# Altium PCB PCB2A.PcbDoc
Units mm, origin at the board's own origin, x right, y up, seen from the top; angles counter-clockwise.
Board outline 36.75 x 32.02 mm, 2 copper layers (Top Layer, Bottom Layer); 36 components, 19 nets, 124 pads, 106 vias.
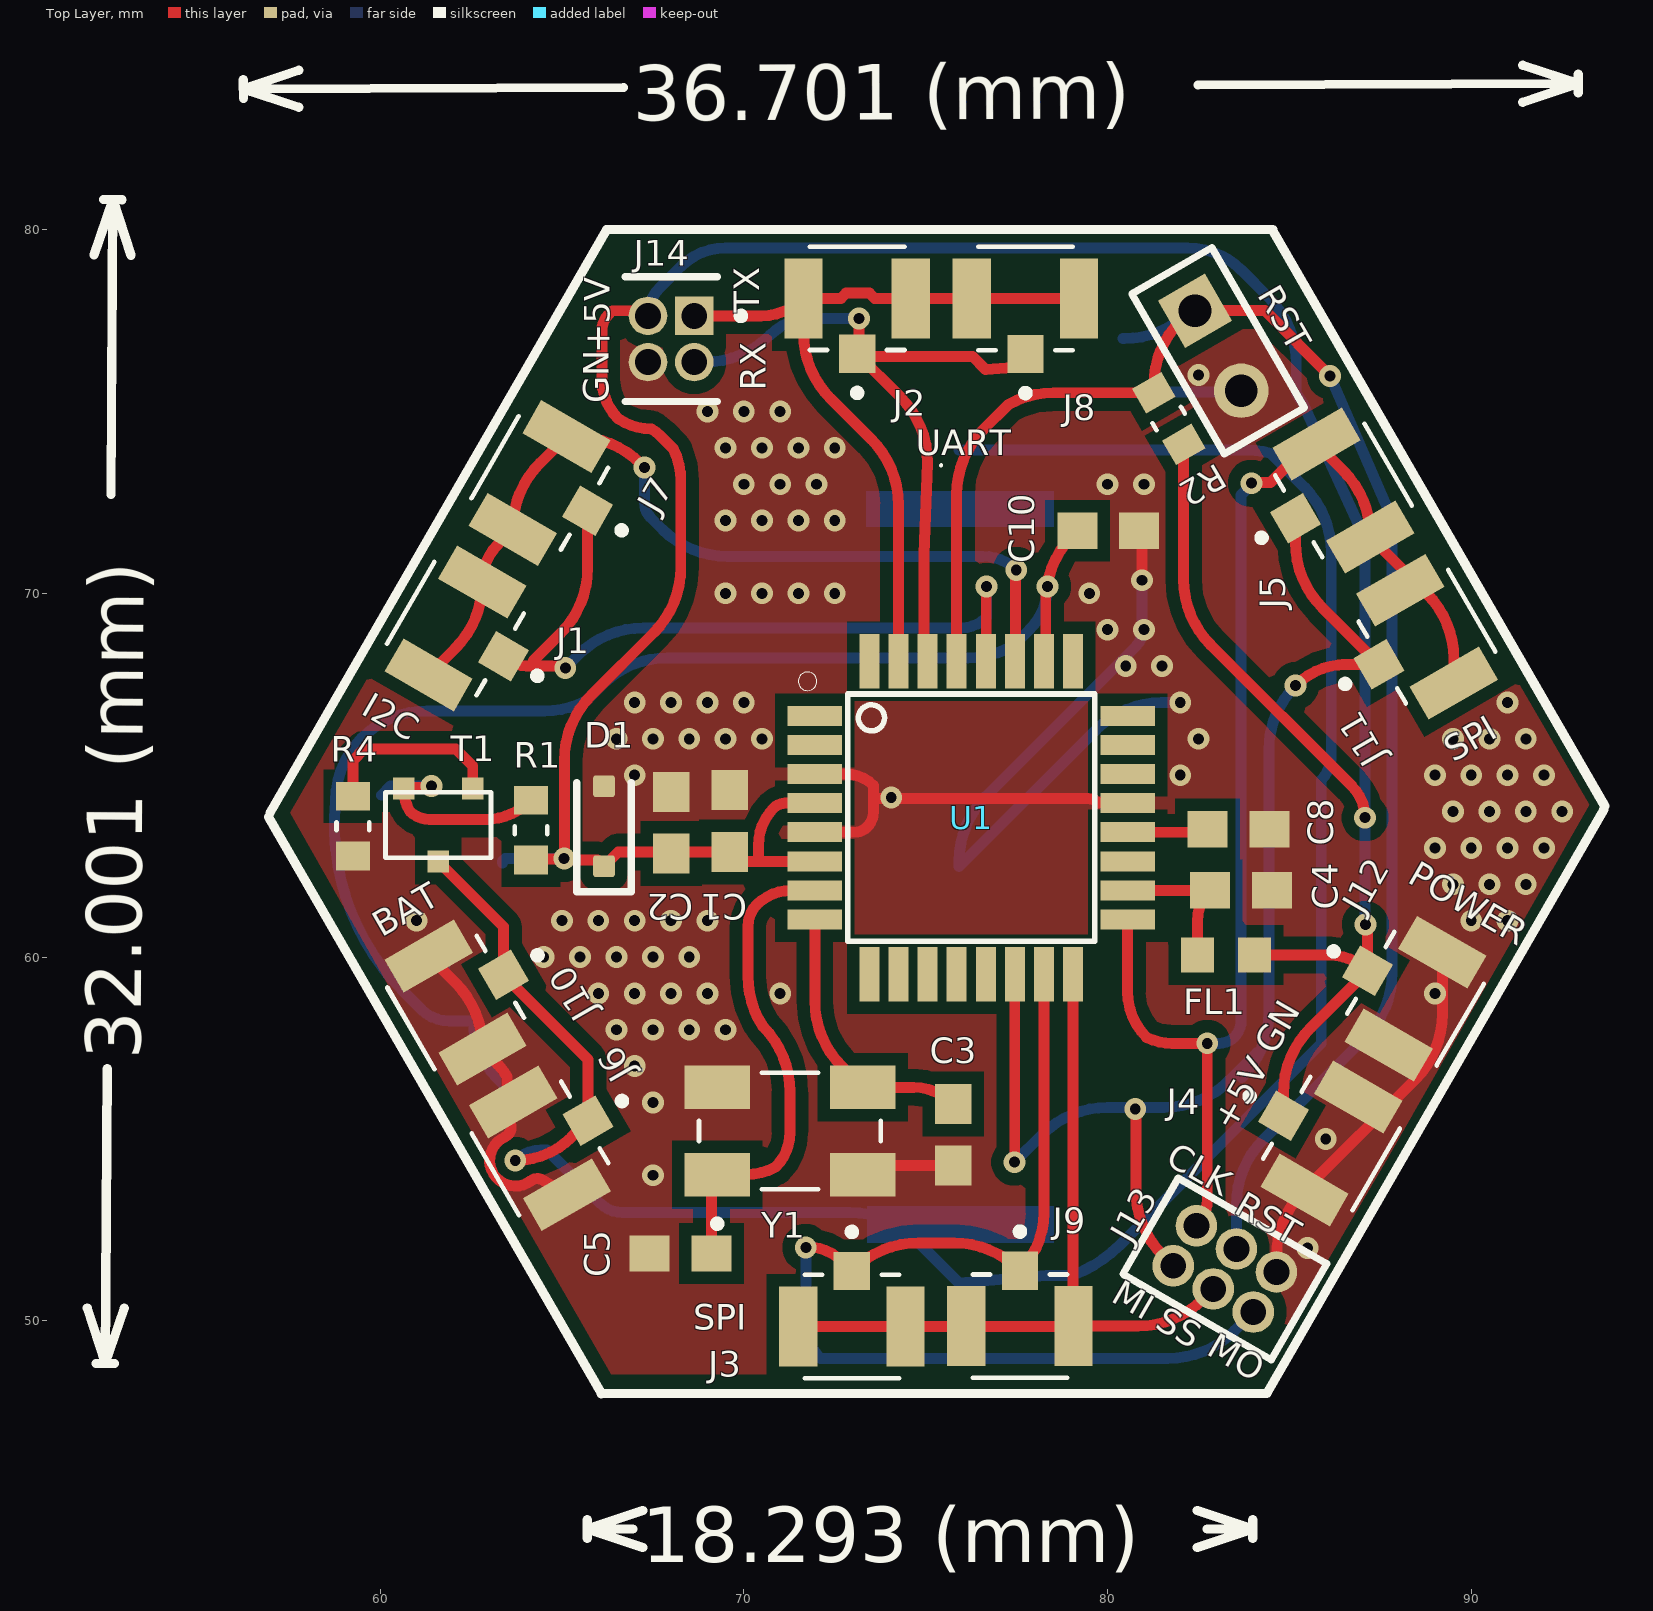
[diagram p0: Top Layer view]
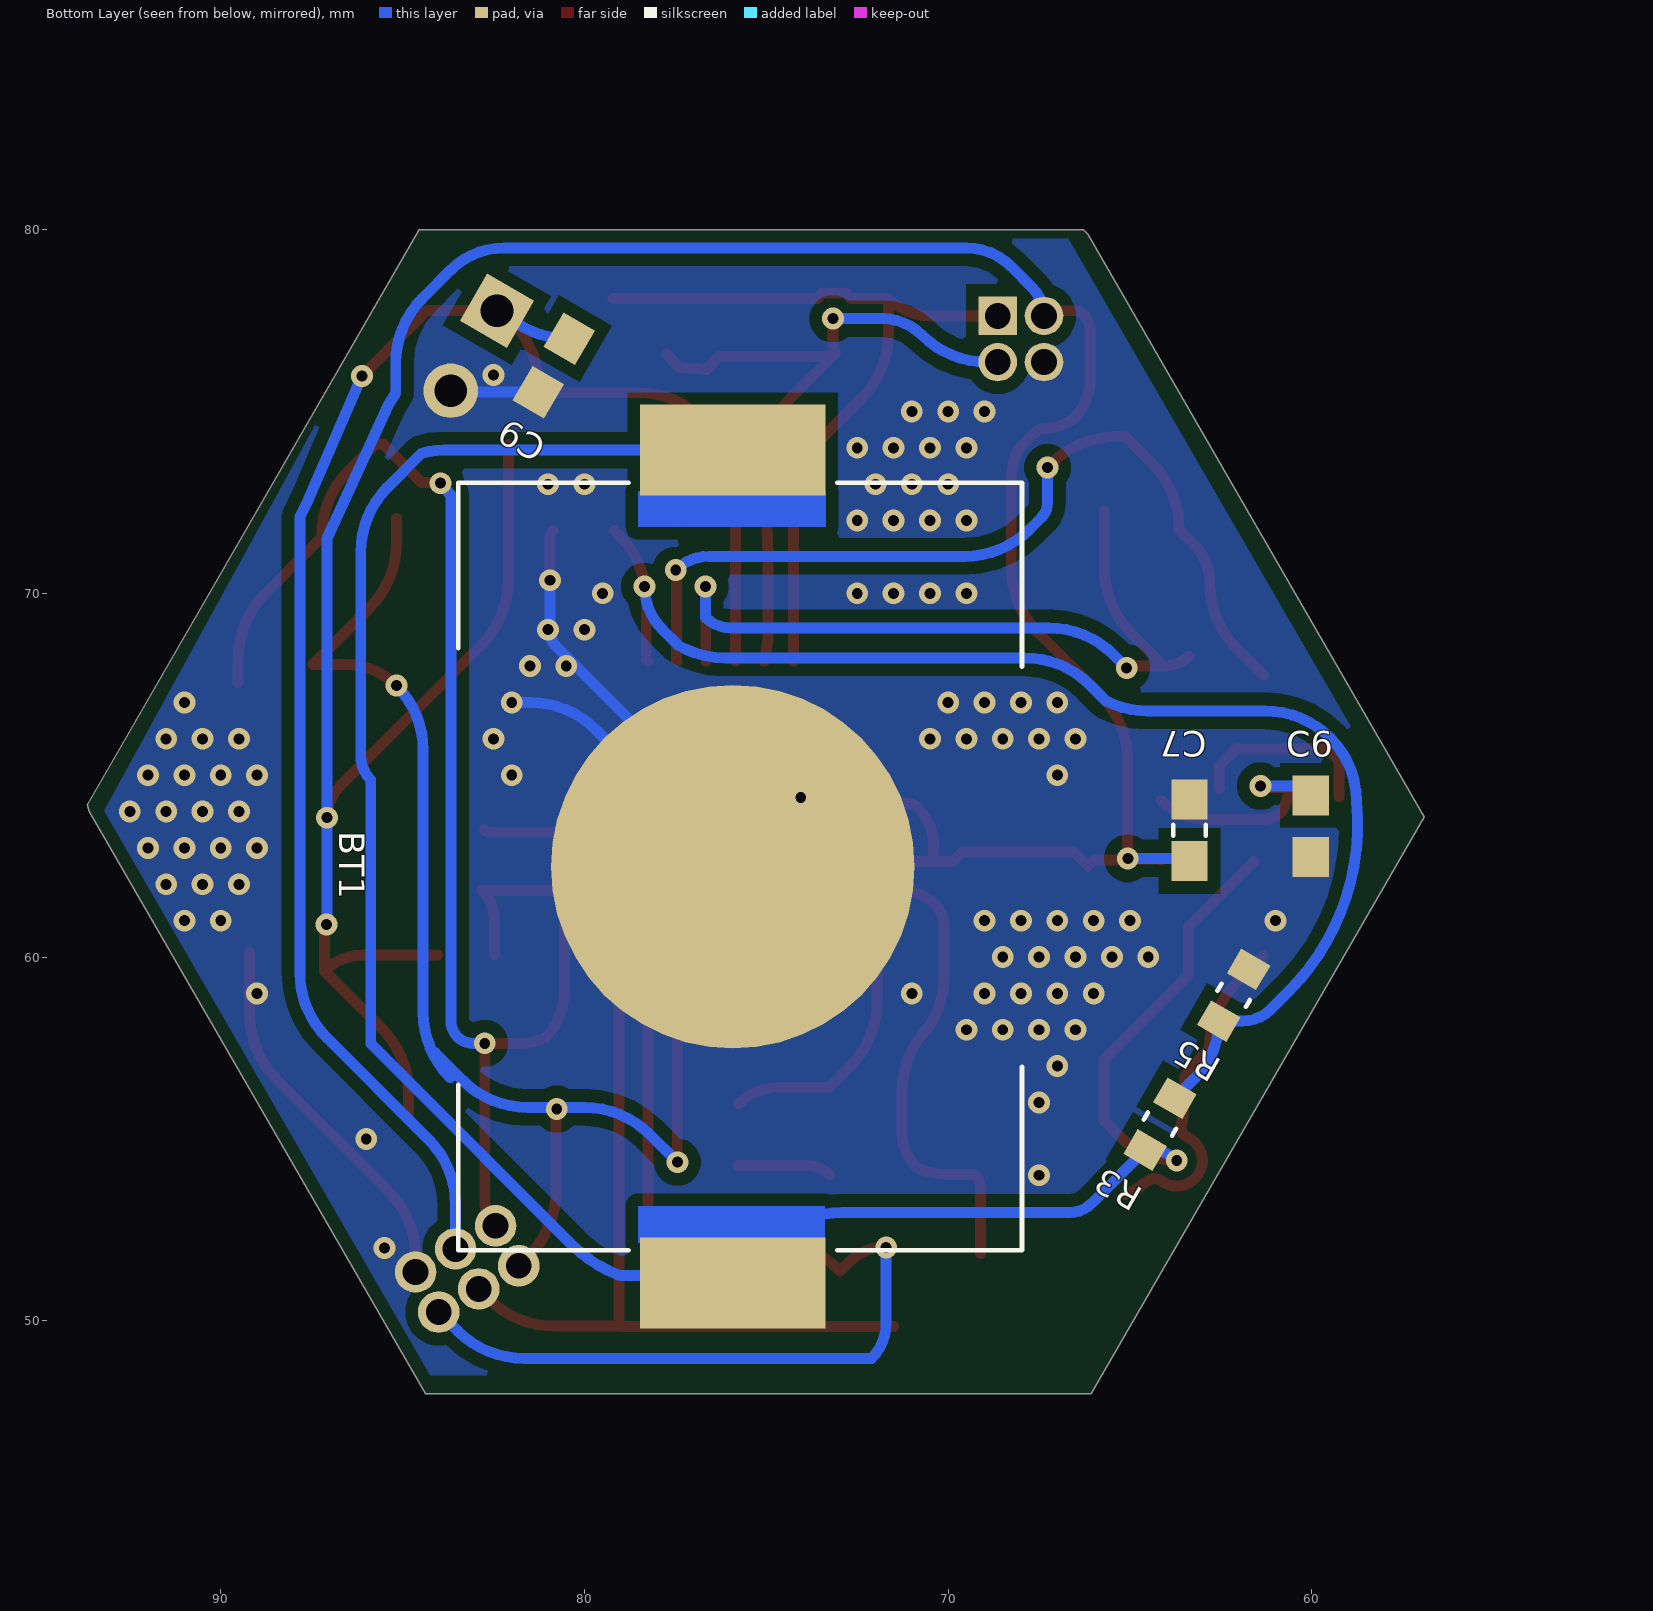
[diagram p1: Bottom Layer view, seen from below]
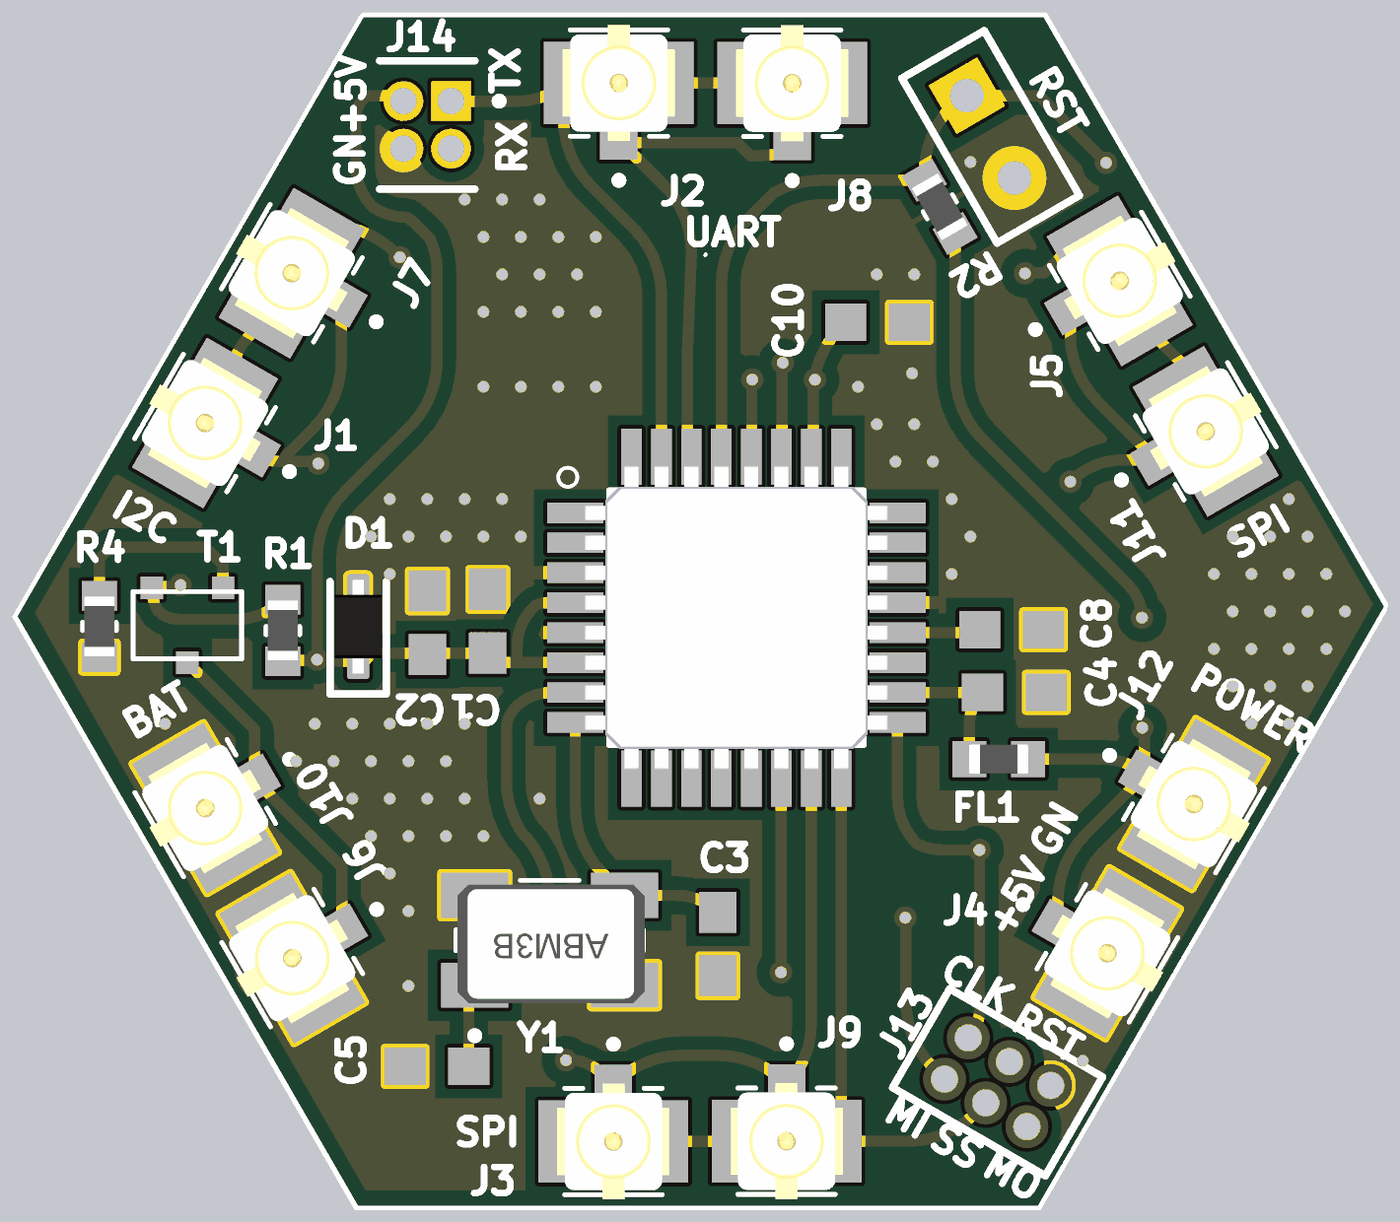
[diagram p2: 3D render of the assembled board from above, using the file's embedded part models]

## Layer stack, top to bottom
Top Solder: solder mask 0.0102, Solder Resist, Dk 3.5
Top Layer: signal copper 0.0356
Dielectric 1: dielectric 0.32, FR-4, Dk 4.8
Bottom Layer: signal copper 0.0356
Bottom Solder: solder mask 0.0102, Solder Resist, Dk 3.5

## Board outline
66.065,48 56.913,63.851 66.166,79.878 66.288,80 84.54,80 93.665,64.195 93.613,64.003 84.363,47.981 84.363,48

## Design rules (kind name [scope] priority, off if disabled: settings)
Clearance [All] p1: gap=0.25 ignorepadtopadclearanceinfootprint=TRUE
ComponentClearance [All] p1 off: gap=0.254 collisioncheckmode=3 verticalgap=0.254 showdistances=FALSE
PolygonConnect PolygonConnect_3 [All vs IsNamedPolygon('B-_L02_P000')] p1: connectstyle=Direct reliefconductorwidth=0.254 reliefentries=4 polygonreliefangle="90 Angle" airgapwidth=0.254
PolygonConnect PolygonConnect_2 [All vs IsNamedPolygon('B-_L01_P001')] p2: connectstyle=Direct reliefconductorwidth=0.254 reliefentries=4 polygonreliefangle="90 Angle" airgapwidth=0.254
PolygonConnect PolygonConnect_1 [All vs IsNamedPolygon('+5V_L02_P002')] p3: connectstyle=Direct reliefconductorwidth=0.254 reliefentries=4 polygonreliefangle="90 Angle" airgapwidth=0.254
PolygonConnect [All] p4: connectstyle=Relief reliefconductorwidth=0.254 reliefentries=4 polygonreliefangle="90 Angle" airgapwidth=0.254
RoomDefinition PCB2A [InComponentClass('PCB2A')] p1 off: confinementstyle=ConfineIn formatcopy=TRUE lockcomponents=FALSE outline 54.456,126.705 93.664,126.705 93.664,98.262 54.456,98.262
RoutingVias [All] p1: holewidth=0.711 width=1.27 viastyle="Through Hole" minholewidth=0.711 minwidth=1.27 maxholewidth=0.711 maxwidth=1.27
SolderMaskExpansion [All] p1: expansion=0.102 istentingtop=FALSE
Width [All] p1: maxlimit=1 minlimit=0.254 preferedwidth=0.3
29 further rules are at their usual default settings.

## Components (designator, comment, footprint, x,y, rotation, side; value= is the part's Value field where it differs from the comment)
BT1 "BAT-HLD-001-TR" BAT_BAT-HLD-001-TR 75.921,62.485 r90 bottom
C1 "Cap" CAPC1608X90 69.617,63.738 r270 top value=0.1uF
C2 "Cap" CAPC1608X90 68.008,63.694 r270 top value=0.1uF
C3 "Cap" CAPC1608X90 75.761,55.116 r90 top value=10pF
C4 "Cap" CAPC1608X90 83.673,61.838 r180 top value=0.1uF
C5 "Cap" CAPC1608X90 68.262,51.85 r0 top value=10pF
C6 "Cap" CAPC1608X90 60.034,63.598 r90 bottom value=0.1uF
C7 "10uF/10V" CAPC1608X90 63.365,63.488 r90 bottom
C8 "Cap" CAPC1608X90 83.602,63.51 r180 top value=0.1uF
C9 "Cap" CAPC1608X90 80.846,76.266 r120 bottom value=0.1uF
C10 "Cap" CAPC1608X90 80.02,71.722 r180 top value=0.1uF
D1 "Zener-Diode" SOD-323F 66.156,63.595 r90 top value=Z-Diode
FL1 "MMZ1608A222BTD25" BEADC1608X95N 83.256,60.057 r0 top
J1 "CONUFL001-SMD-T" LINX_CONUFL001-SMD-T 62.071,69.031 r60 top
J2 "CONUFL001-SMD-T" LINX_CONUFL001-SMD-T 73.117,78.11 r0 top
J3 "CONUFL001-SMD-T" LINX_CONUFL001-SMD-T 72.972,49.843 r180 top
J4 "CONUFL001-SMD-T" LINX_CONUFL001-SMD-T 86.156,54.871 r240 top
J5 "CONUFL001-SMD-T" LINX_CONUFL001-SMD-T 86.487,72.827 r300 top
J6 "CONUFL001-SMD-T" LINX_CONUFL001-SMD-T 64.398,54.742 r120 top
J7 "CONUFL001-SMD-T" LINX_CONUFL001-SMD-T 64.388,73.031 r60 top
J8 "CONUFL001-SMD-T" LINX_CONUFL001-SMD-T 77.744,78.105 r0 top
J9 "CONUFL001-SMD-T" LINX_CONUFL001-SMD-T 77.593,49.851 r180 top
J10 "CONUFL001-SMD-T" LINX_CONUFL001-SMD-T 62.077,58.747 r120 top
J11 "CONUFL001-SMD-T" LINX_CONUFL001-SMD-T 88.783,68.808 r300 top
J12 "CONUFL001-SMD-T" LINX_CONUFL001-SMD-T 88.467,58.855 r240 top
J13 "SAMTEC-FTS-103-02-X-D" SAMTEC-FTS-103-02-X-D 81.808,51.51 r330 top
J14 "FW-02-02-G-D-275-110" SAMTEC_FW-02-02-G-D-275-110 68.001,76.992 r180 top
R1 "10K" RESC1608X55N 64.148,63.488 r90 top value=0R
R2 "10K" RESC1608X55N 81.683,74.804 r300 top
R3 "10K" RESC1608X55N 64.177,55.405 r300 bottom value=1MEG
R4 "10K" RESC1608X55N 59.251,63.598 r90 top
R5 "10K" RESC1608X55N 62.152,58.949 r300 bottom value=1MEG
RST "Header 2" HDR1X2 82.406,77.772 r300 top
T1 "SSM3J338R,LF" SSM3J338R,LF 61.599,63.631 r180 top
U1 "ATMEGA328-AU" QFP80P900X900X120-32N 76.253,63.832 r0 top
Y1 "ABM3B-16MHZ-10-1-U-T" XTAL_ABM3B-16MHZ-10-1-U-T 71.269,55.219 r90 top

## Footprints (in the part's own frame and the unit in brackets; to place one, negate y for a bottom-side part, rotate by r counter-clockwise, add the part's x,y. Pads: shape width x height; smd on the part's side, far side on the other; paste and mask are expansions set on the pad)
BAT_BAT-HLD-001-TR [mm]
  round 10 smd paste-10: N1(0,0)
  rect 2.5x5.1 smd: P1(-11.45,0) P2(11.45,0)
  silkscreen extent -10.55,-7.95 10.55,7.55
BEADC1608X95N [mm]
  rect 0.9x0.97 smd: 1(-0.785,0) 2(0.785,0)
  body extent -0.8,-0.4 0.8,0.4, height 0.95
CAPC1608X90 [mm]
  rect 1.1x1 smd: 1(-0.85,0) 2(0.85,0)
HDR1X2 [mm] "Connector; Header; 2 Position"
  rect 1.5x1.5 hole 0.9: 1(0,0)
  round 1.5 hole 0.9: 2(2.54,0)
  silkscreen extent -1.27,-1.27 3.81,1.27
LINX_CONUFL001-SMD-T [mm]
  rect 1x1.05 smd: 1(0,-1.525)
  rect 1.05x2.2 smd: 2(-1.475,0) 3(1.475,0)
  silkscreen extent -1.3,-2.7 1.3,1.42, body extent -1.5,-1.55 1.5,1.55, height 1.3
QFP80P900X900X120-32N [mm]
  rect 1.5x0.55 smd: 1(-4.3,2.8) 2(-4.3,2) 3(-4.3,1.2) 4(-4.3,0.4) 5(-4.3,-0.4) 6(-4.3,-1.2) 7(-4.3,-2) 8(-4.3,-2.8) 17(4.3,-2.8) 18(4.3,-2) 19(4.3,-1.2) 20(4.3,-0.4) 21(4.3,0.4) 22(4.3,1.2) 23(4.3,2) 24(4.3,2.8)
  rect 0.55x1.5 smd: 9(-2.8,-4.3) 10(-2,-4.3) 11(-1.2,-4.3) 12(-0.4,-4.3) 13(0.4,-4.3) 14(1.2,-4.3) 15(2,-4.3) 16(2.8,-4.3) 25(2.8,4.3) 26(2,4.3) 27(1.2,4.3) 28(0.4,4.3) 29(-0.4,4.3) 30(-1.2,4.3) 31(-2,4.3) 32(-2.8,4.3)
  silkscreen extent -4.75,-3.4 3.4,4, body extent -4.5,-4.5 4.5,4.5, height 0.82
RESC1608X55N [mm]
  rect 0.79x0.93 smd: 1(-0.82,0) 2(0.82,0)
  silkscreen extent -0.11,-0.45 0.11,0.45, body extent -0.8,-0.4 0.8,0.4, height 0.55
SAMTEC-FTS-103-02-X-D [mil]
  round 45 hole 27.95 mask+0: 1(0,0) 2(0,50) 3(50,0) 4(50,50) 5(100,0) 6(100,50)
  silkscreen extent -43,-35 143,85
SAMTEC_FW-02-02-G-D-275-110 [mm]
  rect 1.06x1.06 / inner round 1.06 / far side rect 1.06x1.06 hole 0.71: 01(-0.635,-0.635)
  round 1.06 hole 0.71: 02(-0.635,0.635) 03(0.635,-0.635) 04(0.635,0.635)
  silkscreen extent -2.02,-1.72 1.27,1.72
SOD-323F [mm]
  rrect25% 0.6x0.6 smd: A(1.1,0) K(-1.1,0)
  silkscreen extent -1.8,-0.75 1.2,0.75, body extent -1.25,-0.63 1.25,0.63, height 1
SSM3J338R,LF [mm]
  rect 0.6x0.6 smd: P$1(-0.95,-1) P$2(0.95,-1) P$3(0,1)
  silkscreen extent -1.45,-0.9 1.45,0.9
XTAL_ABM3B-16MHZ-10-1-U-T [mm]
  rect 1.2x1.8 smd: 1(-1.2,2) 2(-1.2,-2) 3(1.2,-2) 4(1.2,2)
  silkscreen extent -2.65,-2.5 1.6,2.5, body extent -1.69,-2.53 1.49,2.47, height 1.1

## Part data
BT1: "Battery Retainer Coin, 20.0mm 1 Cell SMD (SMT) Tab", Package=None, Availability=Unavailable, MP=BAT-HLD-001-TR, Price=None
C1 C2 C3 C4 C5 C6 C8 C9 C10: "Capacitor", LatestRevisionDate=17-Jul-2002, LatestRevisionNote="Re-released for DXP Platform.", PackageDescription="Radial Cap, Thru-Hole; 2 Leads; 0.3 in Pin Spacing", PackageReference=RAD-0.3, Published=8-Jun-2000, Publisher="Altium Limited"
C7: library part CC0603MRX5R7BB106, "CAP CER 10UF 16V X5R 0603", Package=None, Availability=Unavailable, MP=CC0603MRX5R7BB106, Price=None
FL1: "Ferrite Beads Multi-Layer 2.2KOhm 25% 100MHz 0.2A 0.8Ohm DCR 0603 Automotive T/R", Package="0603 TDK", Availability=Good, Check_prices=https://www.snapeda.com/parts/MMZ1608A222BTD25/TDK/view-part/2727619/?ref=eda, MF=TDK, MP=MMZ1608A222BTD25, Price=None, Purchase-URL=https://pricing.snapeda.com/search/part/MMZ1608A222BTD25/?ref=eda, SnapEDA_Link=https://www.snapeda.com/parts/MMZ1608A222BTD25/TDK/view-part/2727619/?ref=snap
J1 J2 J3 J4 J5 J6 J7 J8 J9 J10 J11 J12: "U.FL (UMCC) Connector Jack, Male Pin 50Ohm Surface Mount Solder", Package=None, Availability=Unavailable, Check_prices=https://www.snapeda.com/parts/CONUFL001-SMD-T/Linx/view-part/?ref=eda, MF=Linx, MP=CONUFL001-SMD-T, Price=None, SnapEDA_Link=https://www.snapeda.com/parts/CONUFL001-SMD-T/Linx/view-part/?ref=snap
J13: Package=None, Availability=Unavailable, MF=Samtec, MP=SAMTEC-FTS-103-02-X-D, Price=None
J14: "Conn Board Stacker HDR 4 POS 1.27mm Solder ST Top Entry Thru-Hole Layer", Package=None, Check_prices=https://www.snapeda.com/parts/FW-02-02-G-D-275-110/Samtec/view-part/?ref=eda, MF=Samtec, MP=FW-02-02-G-D-275-110, SnapEDA_Link=https://www.snapeda.com/parts/FW-02-02-G-D-275-110/Samtec/view-part/?ref=snap
R1 R2 R3 R4 R5: library part RT0603FRD0710KL, "Res Thin Film 0603 10K Ohm 1% 0.1W(1/10W) Â±25ppm/C Molded SMD Paper T/R", Package=0603, Availability="In Stock", Check_prices=https://www.snapeda.com/parts/RT0603FRD0710KL/Yageo/view-part/?ref=eda, MF=Yageo, MP=RT0603FRD0710KL, Price=None, Purchase-URL=https://pricing.snapeda.com/search/part/RT0603FRD0710KL/?ref=eda, SnapEDA_Link=https://www.snapeda.com/parts/RT0603FRD0710KL/Yageo/view-part/?ref=snap
RST: "Header, 2-Pin", LatestRevisionDate=17-Jul-2002, LatestRevisionNote="Re-released for DXP Platform.", Publisher="Altium Limited"
T1: "P-Channel 12 V 6A (Ta) 1W (Ta) Surface Mount SOT-23F", Package="SOT-23-3 Toshiba Semiconductor and Storage", Availability="In Stock", Check_prices=https://www.snapeda.com/parts/SSM3J338R,LF/Toshiba+Semiconductor+and+Storage/view-part/?ref=eda, MF="Toshiba Semiconductor and Storage", MP=SSM3J338R,LF, Price=None, Purchase-URL=https://pricing.snapeda.com/search/part/SSM3J338R,LF/?ref=eda, SnapEDA_Link=https://www.snapeda.com/parts/SSM3J338R,LF/Toshiba+Semiconductor+and+Storage/view-part/?ref=snap
U1: "AVR AVRÂ® ATmega Microcontroller IC 8-Bit 20MHz 32KB (16K x 16) FLASH 32-TQFP (7x7)", Package="TQFP-32 Microchip", Availability="In Stock", Check_prices=https://www.snapeda.com/parts/ATMEGA328-AU/Microchip/view-part/?ref=eda, MF=Microchip, MP=ATMEGA328-AU, Price=None, Purchase-URL=https://pricing.snapeda.com/search/part/ATMEGA328-AU/?ref=eda, SnapEDA_Link=https://www.snapeda.com/parts/ATMEGA328-AU/Microchip/view-part/?ref=snap
Y1: "Crystals 16.0 MHZ 10PF", Package="SMD-4 Abracon LLC", Check_prices=https://www.snapeda.com/parts/ABM3B-16MHZ-10-1-U-T/Abracon/view-part/?ref=eda, MF=ABRACON, MP=ABM3B-16MHZ-10-1-U-T, SnapEDA_Link=https://www.snapeda.com/parts/ABM3B-16MHZ-10-1-U-T/Abracon/view-part/?ref=snap
D1: Datasheet=https://diotec.com/de/produktliste/Z.html, ki_description="Zener Diode, TVS-unidirectional Diode", ki_keywords="Zener TVS unidirectional Diode", Reference=D

## Via types
v1: diameter 0.6, hole 0.3, Top Layer to Bottom Layer, tented both sides, 106 vias

## Nets (pads, with @x,y where several pads share a name; then routed paths per layer and width w, separated by ;. In a path a pad name is that pad's centre, name@x,y a point inside that pad or via, vN(x,y) a via of type N, cw(c..) or ccw(c..) an arc to the next point about the centre after c; other vN are vias at no path point)
B+: BT1.P1 BT1.P2 J6.1 J10.1 R3.2 T1.P$3 | length 62.8
  Top Layer w0.3: T1.P$3 63.397,60.833 J10.1 65.719,57.188 J6.1 65.262,55.047 cw(c63.716,56.594) v1(63.716,54.407)
  Bottom Layer w0.3: v1@63.718,54.4 cw(c64.43,53.688) 64.43,54.695 R3.2 66.051,53.231 ccw(c66.659,53.839) 66.659,52.979 72.925,52.979 cw(c72.925,50.439) 74.721,52.235 BT1.P1 78.321,51.244 78.966,51.244 ccw(c78.966,51.544) 79.071,51.263 ccw(c77.822,54.574) 80.325,52.072 85.202,56.949 85.876,57.623 85.876,64.87 ccw(c85.213,65.533) 86.093,65.209 ccw(c85.213,65.533) 86.15,65.533 86.15,71.129 ccw(c83.61,71.129) 85.407,72.925 84.48,73.851 ccw(c83.857,71.576) 83.857,73.935 BT1.P2
B-: BT1.N1 C1.1 C2.1 C3.1 C4.1 C5.1 C6.1 C7.2 C8.1 C9.1 C10.1 D1.A J4.2 J4.3 J6.2 J6.3 J10.2 J10.3 J12.2 J12.3 J13.6 J14.04 R4.1 R5.1 RST.2 U1.3 U1.5 U1.21 Y1.2 Y1.4 | length 54.5
  Top Layer w0.3: J10.3 62.07,59.294 cw(c60.274,57.498) 62.814,57.498 J10.2 63.234,57.05 cw(c62.203,56.019) 63.492,56.701 63.492,56.161 63.508,56.003 63.558,55.527 63.56,55.523 cw(c63.269,55.45) 63.56,55.521 ccw(c66.032,56.108) 63.591,55.404 cw(c63.303,55.322) 63.427,55.049 ccw(c63.716,54.407) 64.144,53.848 cw(c64.325,53.608) 64.481,53.864 64.633,53.771 cw(c64.476,53.516) 64.735,53.666 J6.2 ; U1.5 73.049,63.432 ccw(c73.049,63.917) 73.392,63.574 ccw(c72.972,63.994) 73.566,63.994 73.566,64.355 ; U1.3 72.803,65.032 cw(c72.803,63.953) 73.566,64.716 73.566,64.355 ; Y1.2 cw(c73.866,53.422) 73.866,54.266 C3.1 ; 79.763,64.232 ccw(c79.466,63.935) 79.466,64.355 73.566,64.355 ; C10.1 cw(c80.689,71.541) 80.945,71.541 v1(80.945,70.359) ; J13.6 84.643,51.765 cw(c87.183,51.765) 85.387,53.561 J4.3 88.461,56.635 ccw(c86.665,58.431) 89.205,58.431 J12.2
  Bottom Layer w0.3: R5.1 R5.1@61.777,59.694 ; v1(80.945,70.359) 80.945,68.926 cw(c80.426,68.926) 80.793,68.559 76.665,64.431 ccw(c78.461,62.635) 75.921,62.635 BT1.N1 79.692,66.256 cw(c81.488,64.46) 81.488,67 v1(82,67) ; C9.1 83.295,75.53 ccw(c83.295,76.039) RST.2@83.655,75.679
  other v1: 85.5,52 67.5,54 86,55 67.5,56 67,57 66.5,58 67.5,58 68.5,58 69.5,58 66,59 67,59 68,59 69,59 71,59 89,59 64.5,60 65.5,60 66.5,60 67.5,60 68.5,60 61,61 65,61 66,61 67,61 68,61 69,61 90,61 91,61 89.5,62 90.5,62 91.5,62 89,63 90,63 91,63 92,63 89.5,64 90.5,64 91.5,64 92.5,64 74.055,64.389 67,65 82,65 89,65 90,65 91,65 92,65 66.5,66 67.5,66 68.5,66 69.5,66 70.5,66 82.5,66 89.5,66 90.5,66 91.5,66 67,67 68,67 69,67 70,67 91,67 80.5,68 81.5,68 80,69 81,69 69.5,70 70.5,70 71.5,70 72.5,70 79.5,70 69.5,72 70.5,72 71.5,72 72.5,72 70,73 71,73 72,73 80,73 81,73 69.5,74 70.5,74 71.5,74 72.5,74 69,75 70,75 71,75 82.5,76
BAT: C1.2 C2.2 C7.1 D1.K FL1.2 J4.1 J12.1 J14.03 R1.1 R2.2 U1.4 U1.6 | length 89
  Top Layer w0.3: R1.1 64.171,62.691 65.039,62.691 v1(65.061,62.713) ; J14.03 ccw(c67.021,77.282) 67.021,77.77 66.385,77.77 66.277,77.662 ccw(c66.707,77.232) 66.099,77.232 66.099,75.887 ccw(c67.643,75.887) 66.12,75.635 ccw(c67.643,75.887) 66.551,74.796 ccw(c67.457,76.157) 67.457,74.522 cw(c66.771,73.382) 67.712,74.323 68.07,73.965 cw(c66.283,73.102) 68.267,73.102 68.267,70.711 cw(c65.727,70.711) 67.523,68.915 65.809,67.201 ccw(c67.605,65.405) 65.065,65.405 65.065,62.668 65.983,62.668 D1.K 66.549,62.888 C1.2 69.873,62.632 70.4,62.632 ; U1.6 70.4,62.632 ; U1.4 71.14,64.232 ccw(c71.14,63.795) 70.831,64.104 ccw(c71.872,63.063) 70.4,63.063 70.4,62.632 ; R2.2 82.093,70.38 ccw(c84.633,70.38) 82.837,68.584 86.72,64.701 cw(c85.852,63.832) v1(87.08,63.832) ; FL1.2 86.085,60.057 cw(c86.085,58.556) J12.1 ; J4.1 84.836,56.255 cw(c87.376,56.255) 85.58,58.051 J12.1 ; v1(87.089,60.893) cw(c86.951,60.755) 87.146,60.755 J12.1
  Bottom Layer w0.3: C7.1@63.365,62.588 C7.1 63.44,62.713 v1(65.061,62.713) ; J14.03 cw(c68.457,77.627) 67.686,78.399 68.278,78.991 cw(c69.502,77.767) 69.502,79.498 82.204,79.498 cw(c82.204,77.408) 83.681,78.886 84.446,78.121 cw(c82.65,76.325) 85.19,76.325 85.19,75.509 85.372,75.217 87.08,71.511 v1(87.08,63.832) 87.085,63.827 87.085,60.897 v1(87.089,60.893)
BAT_SEN: C10.2 R3.1 R5.2 U1.26 | length 36.9
  Top Layer w0.3: U1.26 78.302,68.18 78.302,69.801 cw(c80.842,69.801) 78.328,70.168 cw(c80.842,69.801) 79.045,71.597 C10.2 ; v1(78.35,70.19) v1@78.485,70.19
  Bottom Layer w0.3: 59.494,66.022 ccw(c61.231,64.287) 58.776,64.301 cw(c58.476,64.302) 58.775,64.274 ccw(c65.222,63.636) 60.643,59.053 61.14,58.556 ccw(c61.906,59.322) 61.906,58.239 R5.2 ccw(c64.78,58.239) 63.212,56.671 R3.1 ; 59.495,66.023 cw(c61.291,64.227) 61.291,66.767 64.517,66.767 ccw(c64.517,69.307) 65.661,67.039 66.104,67.482 cw(c67.9,65.686) 66.756,67.954 cw(c67.9,65.686) 67.9,68.226 76.143,68.226 ccw(c76.143,70.766) 77.428,68.574 77.86,69.007 ccw(c76.677,70.19) 78.302,69.79 ccw(c76.677,70.19) v1(78.35,70.19)
NetC3_2: C3.2 U1.8 Y1.3 | length 7.7
  Top Layer w0.3: U1.8 71.953,58.787 ccw(c74.493,58.787) 72.697,56.991 Y1.3 74.668,56.419 cw(c74.668,54.873) C3.2
NetC4_2: C4.2 FL1.1 U1.18 | length 4.1
  Top Layer w0.3: U1.18 C4.2@82.817,61.832 ; FL1.1 82.471,60.988 cw(c83.673,60.988) C4.2@82.817,61.832 ; C4.2@82.817,61.832 cw(c83.673,60.988) C4.2 C4.2@82.817,61.832
NetC5_2: C5.2 U1.7 Y1.1 | length 13.2
  Top Layer w0.3: C5.2 69.112,53.639 cw(c69.649,53.639) Y1.1 70.061,54.019 ccw(c70.061,55.717) 70.873,54.226 ccw(c69.916,55.183) 71.269,55.183 71.269,56.299 ccw(c68.729,56.299) 70.865,57.673 ccw(c68.729,56.299) 70.525,58.095 70.518,58.102 cw(c72.654,59.476) 70.114,59.476 70.114,60.849 cw(c70.954,60.849) 70.36,61.443 cw(c71.299,60.504) 71.299,61.832 U1.7
NetC6_2: C6.2 R1.2 T1.P$2 | length 6.5
  Top Layer w0.3: v1(61.415,64.703) 61.379,64.667 60.685,64.667 T1.P$2 60.649,64.62 ccw(c61.841,64.62) 60.817,64.01 ccw(c61.356,64.549) 61.356,63.786 63.049,63.786 ccw(c62.866,65.59) R1.2
  Bottom Layer w0.3: C6.2 60.289,64.703 v1(61.415,64.703)
NetC8_2: C8.2 U1.20 | length 2.2
  Top Layer w0.3: U1.20 82.564,63.432 ccw(c82.564,63.698) C8.2
NetC9_2: C9.2 J13.4 R2.1 RST.1 U1.29 | length 47.1
  Top Layer w0.3: U1.29 75.853,72.717 cw(c78.393,72.717) 76.597,74.514 77.273,75.19 cw(c78.515,72.974) 78.515,75.514 R2.1 81.273,75.715 cw(c83.813,75.715) 82.017,77.511 RST.1@82.385,77.879 ; RST.1 84.328,77.772 v1(86.121,75.979)
  Bottom Layer w0.3: C9.2 80.456,77.002 ccw(c80.456,79.542) 82.252,77.746 RST.1@82.385,77.879 ; RST.1 82.58,77.69 RST.1@82.629,77.667 ; J13.4 83.543,53.188 cw(c86.083,53.188) 84.287,54.984 87.082,57.779 ccw(c85.286,59.575) 87.826,59.575 87.826,72.1 87.599,72.555 v1(86.121,75.979)
NetJ1_1: J1.1 J7.1 U1.28 | length 21.3
  Top Layer w0.3: J1.1 ccw(c64.022,68.898) 64.022,68.007 65.036,68.007 v1(65.093,67.95) ; 64.219,68.151 64.964,68.896 ccw(c63.168,70.692) 65.708,70.692 J7.1 ; U1.28 76.665,68.144 76.665,70.178 v1(76.677,70.19)
  Bottom Layer w0.3: v1(65.093,67.95) 65.449,68.306 cw(c67.245,66.51) 67.245,69.05 75.984,69.05 ccw(c75.984,70.013) 76.665,69.332 ccw(c76.636,69.361) 76.677,69.361 v1(76.677,70.19)
NetJ1_2: J1.2 J1.3 J7.2 J7.3 U1.27 | length 24.7
  Top Layer w0.3: J1.2 62.065,68.484 ccw(c60.269,70.28) 62.809,70.28 J1.3 cw(c64.27,70.308) 63.237,71.341 J7.2 63.65,71.782 cw(c66.19,71.782) 64.394,73.578 J7.3 65.365,74.309 cw(c65.365,71.769) 67.161,73.565 v1(67.269,73.457) ; U1.27 77.472,68.151 77.472,70.618 v1(77.491,70.637)
  Bottom Layer w0.3: v1(67.269,73.457) 67.269,72.493 ccw(c67.856,72.493) 67.441,72.078 67.757,71.762 ccw(c69.553,73.558) 69.553,71.018 76.571,71.018 cw(c76.571,69.717) v1(77.491,70.637)
NetJ2_1: J2.1 J8.1 J14.02 U1.30 | length 20
  Top Layer w0.3: J2.1@73.117,76.604 73.205,76.516 76.284,76.516 76.644,76.156 ccw(c76.644,76.456) 76.664,76.157 77.394,76.205 J8.1 ; v1(73.169,77.552) 73.169,76.637 J2.1 74.309,75.393 cw(c72.513,73.597) 75.053,73.597 cw(c74.753,73.597) 75.053,73.585 74.952,71.067 ccw(c76.209,71.018) 74.951,71.018 74.951,68.732 U1.30
  Bottom Layer w0.3: J14.02 68.929,76.357 ccw(c68.929,78.897) 70.725,77.101 cw(c71.814,76.012) 71.814,77.552 v1(73.169,77.552)
NetJ2_2: J2.2 J2.3 J8.2 J8.3 J14.01 U1.31 | length 21.7
  Top Layer w0.3: J14.01 70.476,77.627 ccw(c70.476,79.276) J2.2 ; U1.31 74.253,72.435 ccw(c71.713,72.435) 73.509,74.231 72.386,75.354 cw(c74.182,77.15) 71.642,77.15 J2.2 ; J8.3 79.214,78.11 76.269,78.11 73.601,78.11 73.459,78.252 72.809,78.252 72.667,78.11 J2.2
NetJ3_1: J3.1 J9.1 J13.5 U1.15 | length 30.4
  Top Layer w0.3: v1@71.678,52.045 cw(c71.678,50.555) 72.731,51.609 J3.1 73.003,51.399 cw(c74.799,49.603) 74.799,52.143 75.774,52.143 cw(c75.774,49.603) 77.57,51.399 J9.1 ccw(c76,52.969) 78.253,52.969 U1.15
  Bottom Layer w0.3: v1(71.705,52.014) 71.705,49.938 ccw(c73.083,49.938) 72.109,48.964 81.653,48.964 ccw(c81.653,51.569) 83.495,49.727 J13.5
NetJ3_2: J3.2 J3.3 J9.2 J9.3 J13.3 U1.16 | length 21.4
  Top Layer w0.3: J3.3 J3.2 78.946,49.843 ccw(c78.946,49.994) J9.2@79.053,49.887 ; U1.16 J9.2@79.053,49.887 ; J9.2 80.832,49.851 ccw(c80.832,52.391) 82.628,50.595 J13.3 ; J9.2@79.133,49.887 J9.2@79.053,49.887
NetJ5_1: J5.1 J11.1 J13.1 U1.14 | length 36
  Top Layer w0.3: v1(77.444,54.36) 77.449,54.365 77.449,59.527 U1.14 ; v1@80.778,55.866 80.778,53.592 ccw(c83.318,53.592) 81.522,51.796 J13.1 ; J5.1 85.166,71.394 ccw(c87.706,71.394) 85.91,69.598 J11.1 86.575,68.046 ccw(c86.575,66.057) 86.353,68.033 ccw(c86.575,66.057) v1(85.169,67.463)
  Bottom Layer w0.3: v1(77.444,54.36) 78.206,55.122 cw(c80.002,53.326) 80.002,55.866 81.555,55.866 ccw(c81.555,58.406) 83.351,56.61 84.111,57.37 ; 83.692,56.683 ccw(c81.896,58.479) 84.436,58.479 84.436,65.692 cw(c86.94,65.692) v1(85.169,67.463)
  other v1: 80.763,55.82
NetJ5_2: J5.2 J5.3 J11.2 J11.3 J13.2 U1.17 | length 36.5
  Top Layer w0.3: U1.17 80.553,59.049 ccw(c82.329,59.049) 81.073,57.793 ccw(c81.775,59.202) 81.775,57.628 v1(82.743,57.628) 82.743,53.334 cw(c81.719,53.334) J13.2 ; v1(83.958,73.028) 83.974,73.044 84.478,73.044 85.539,74.105 J5.2 86.48,73.374 cw(c84.684,71.578) 87.224,71.578 J5.3 88.777,69.997 cw(c86.98,68.201) 89.52,68.201 J11.3
  Bottom Layer w0.3: v1(82.743,57.628) 83.068,57.628 ccw(c83.068,58.225) 83.49,57.803 ccw(c83.048,58.245) 83.673,58.245 83.673,72.702 83.958,72.987 v1(83.958,73.028)
NetR4_2: R4.2 T1.P$1 | length 5.3
  Top Layer w0.3: R4.2 59.251,65.406 59.562,65.717 62.082,65.717 62.549,65.25 T1.P$1 T1.P$1@62.528,64.652
pads on no net: U1.1 U1.2 U1.9 U1.10 U1.11 U1.12 U1.13 U1.19 U1.22 U1.23 U1.24 U1.25 U1.32

## Polygon pours and split planes (outlines as drawn)
B- on Bottom Layer "B-_L02_P000" (solid, remove dead copper, pour order 0): 66.701,79.744 57.598,64.043 66.608,48.497 84.241,48.497 93.206,64.023 84.594,79.744
B- on Top Layer "B-_L01_P001" (solid, remove dead copper, pour order 1): 66.534,79.613 57.528,63.962 59.943,59.699 66.355,48.536 84.213,48.536 87.687,54.46 93.251,64.193 87.485,74.052 84.233,79.613

## Other copper
Bottom Layer:
  rectangle net B+: 73.392,52.143 78.529,53.15
  rectangle net B+: 73.362,71.824 78.525,72.808

## Silkscreen, mask and mechanical layers (free items; w line width, h text height)
Top Overlay:
  lines w0.1: 75.423,73.513 ccw(c75.399,73.537) 75.433,73.537
  lines w0.254: 51.949,50.35 52.447,48.823 ; 52.135,79.302 52.653,80.823 ; 52.193,48.825 52.701,48.822 ; 52.399,80.825 52.907,80.822 ; 52.499,56.926 52.447,48.823 ; 52.601,72.72 52.653,80.823 ; 52.965,50.344 52.447,48.823 ; 53.151,79.296 52.653,80.823 ; 56.24,84.12 56.242,83.612 ; 56.932,63.847 66.084,47.996 ; 56.975,63.967 66.228,79.994 ; 57.763,84.38 56.241,83.866 ; 57.767,83.364 56.241,83.866 ; 65.697,44.018 65.697,44.526 ; 66.082,48 84.38,48 ; 66.288,80 84.54,80 ; 66.694,83.909 56.241,83.866 ; 66.946,44.272 65.697,44.272 ; 67.221,43.764 65.697,44.272 ; 67.221,44.78 65.697,44.272 ; 82.466,43.764 83.99,44.272 ; 82.466,44.78 83.99,44.272 ; 82.488,83.974 92.941,84.017 ; 82.74,44.272 83.99,44.272 ; 83.99,44.018 83.99,44.526 ; 84.395,48.033 93.645,64.055 ; 84.546,79.96 93.671,64.155 ; 91.415,84.519 92.941,84.017 ; 91.419,83.503 92.941,84.017 ; 92.94,84.271 92.942,83.763
  text "36.701 (mm)" at 66.952,82.996 h1.52 r0.24
  text "TX" at 70.424,77.717 h0.7 r90
  text "+5V" at 66.309,76.606 h0.7 r90
  text "RX" at 70.601,75.57 h0.7 r90
  text "GN" at 66.281,75.227 h0.7 r90
  text "UART" at 74.733,73.792 h0.7
  text "I2C" at 59.435,66.698 h0.7 r330
  text "SPI" at 89.502,65.343 h0.7 r30
  text "POWER" at 88.214,62.072 h0.7 r330
  text "BAT" at 60.04,60.534 h0.7 r30
  text "GN" at 84.597,57.271 h0.7 r60
  text "32.001 (mm)" at 53.415,57.174 h1.52 r89.63
  text "+5V" at 83.426,55.163 h0.7 r60
  text "CLK" at 81.559,54.337 h0.7 r330
  text "RST" at 83.448,52.988 h0.7 r330
  text "MI" at 80.061,50.547 h0.7 r330
  text "SS" at 81.277,49.822 h0.7 r330
  text "SPI" at 68.617,49.758 h0.7
  text "MO" at 82.682,49.09 h0.7 r330
  text "18.293 (mm)" at 67.2,43.358 h1.52
Bottom Solder:
  rectangle: 73.279,71.824 78.569,73.035
  rectangle: 73.289,52.243 78.555,53.112
Mechanical 1:
  lines w0.254: 84.363,47.981 93.613,64.003 93.665,64.195 84.54,80 66.288,80 66.166,79.878 56.913,63.851 66.065,48 84.363,48